# Altium PCB PCB1.PcbDoc
Units mm, origin at the board's own origin, x right, y up, seen from the top; angles counter-clockwise.
Board outline 36.2 x 44.83 mm, 4 copper layers (Top Layer 1, Top Layer, Bottom Layer, Bottom Layer 1), stack 0.55 mm thick; 54 components, 49 nets, 224 pads, 41 vias.
Unrouted connection lines stored in the file: 11.
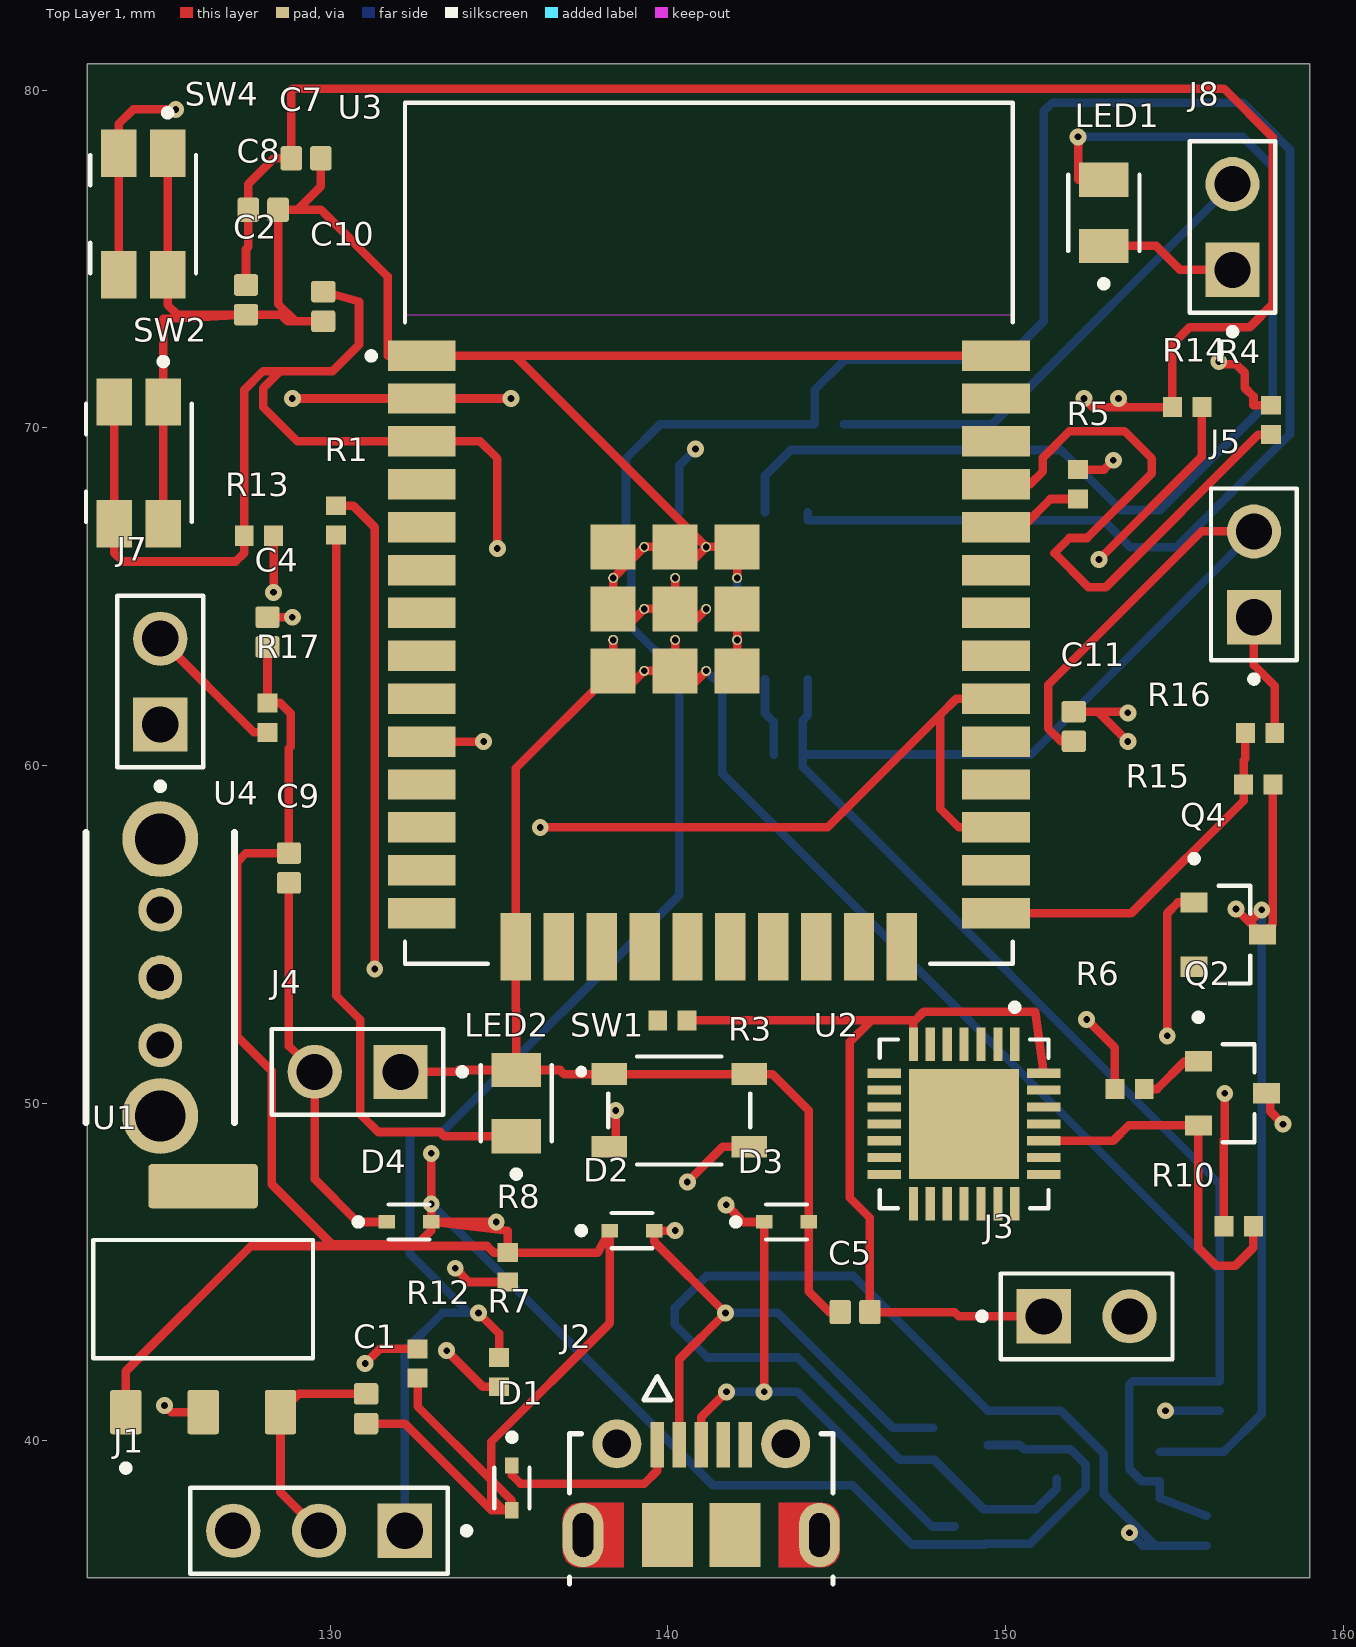
[diagram p0: Top Layer 1 view]
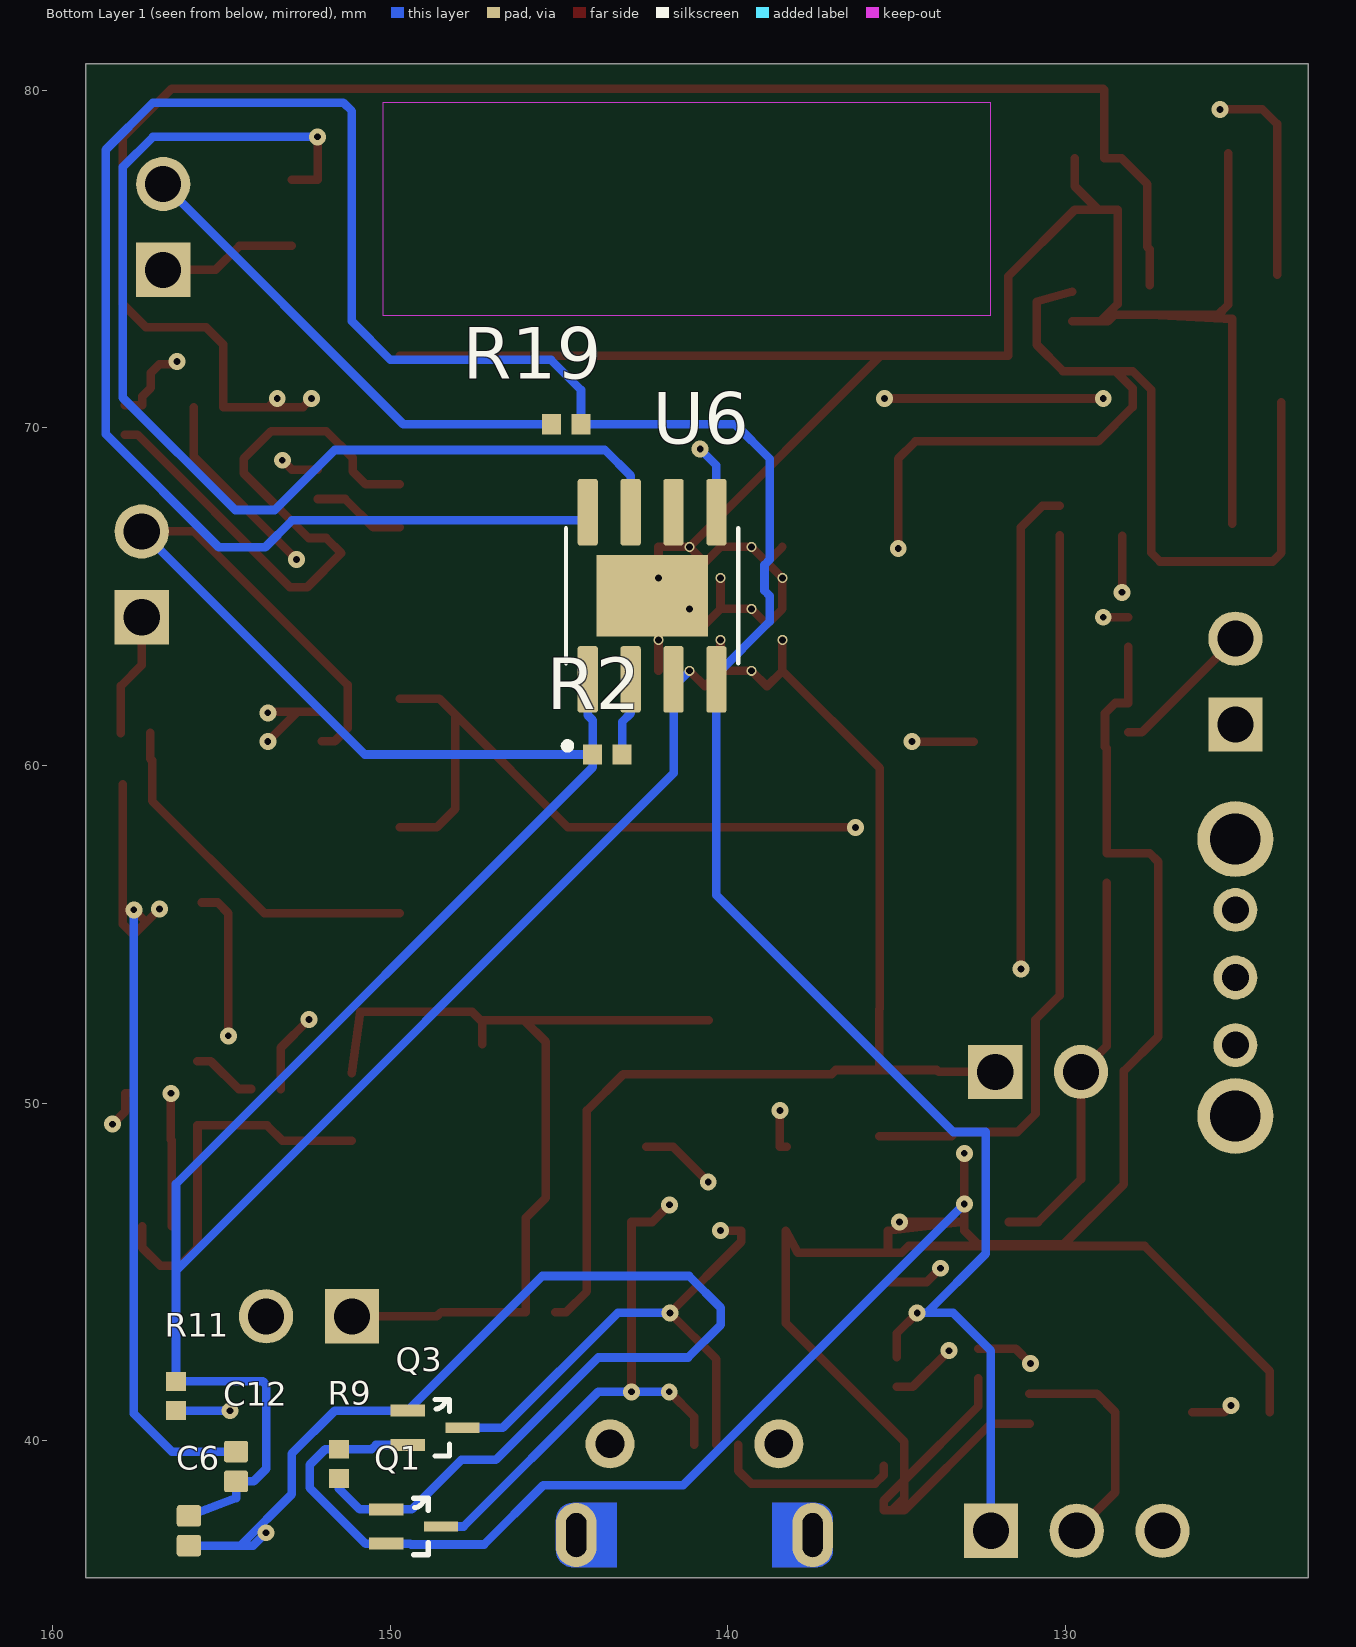
[diagram p1: Bottom Layer 1 view, seen from below]
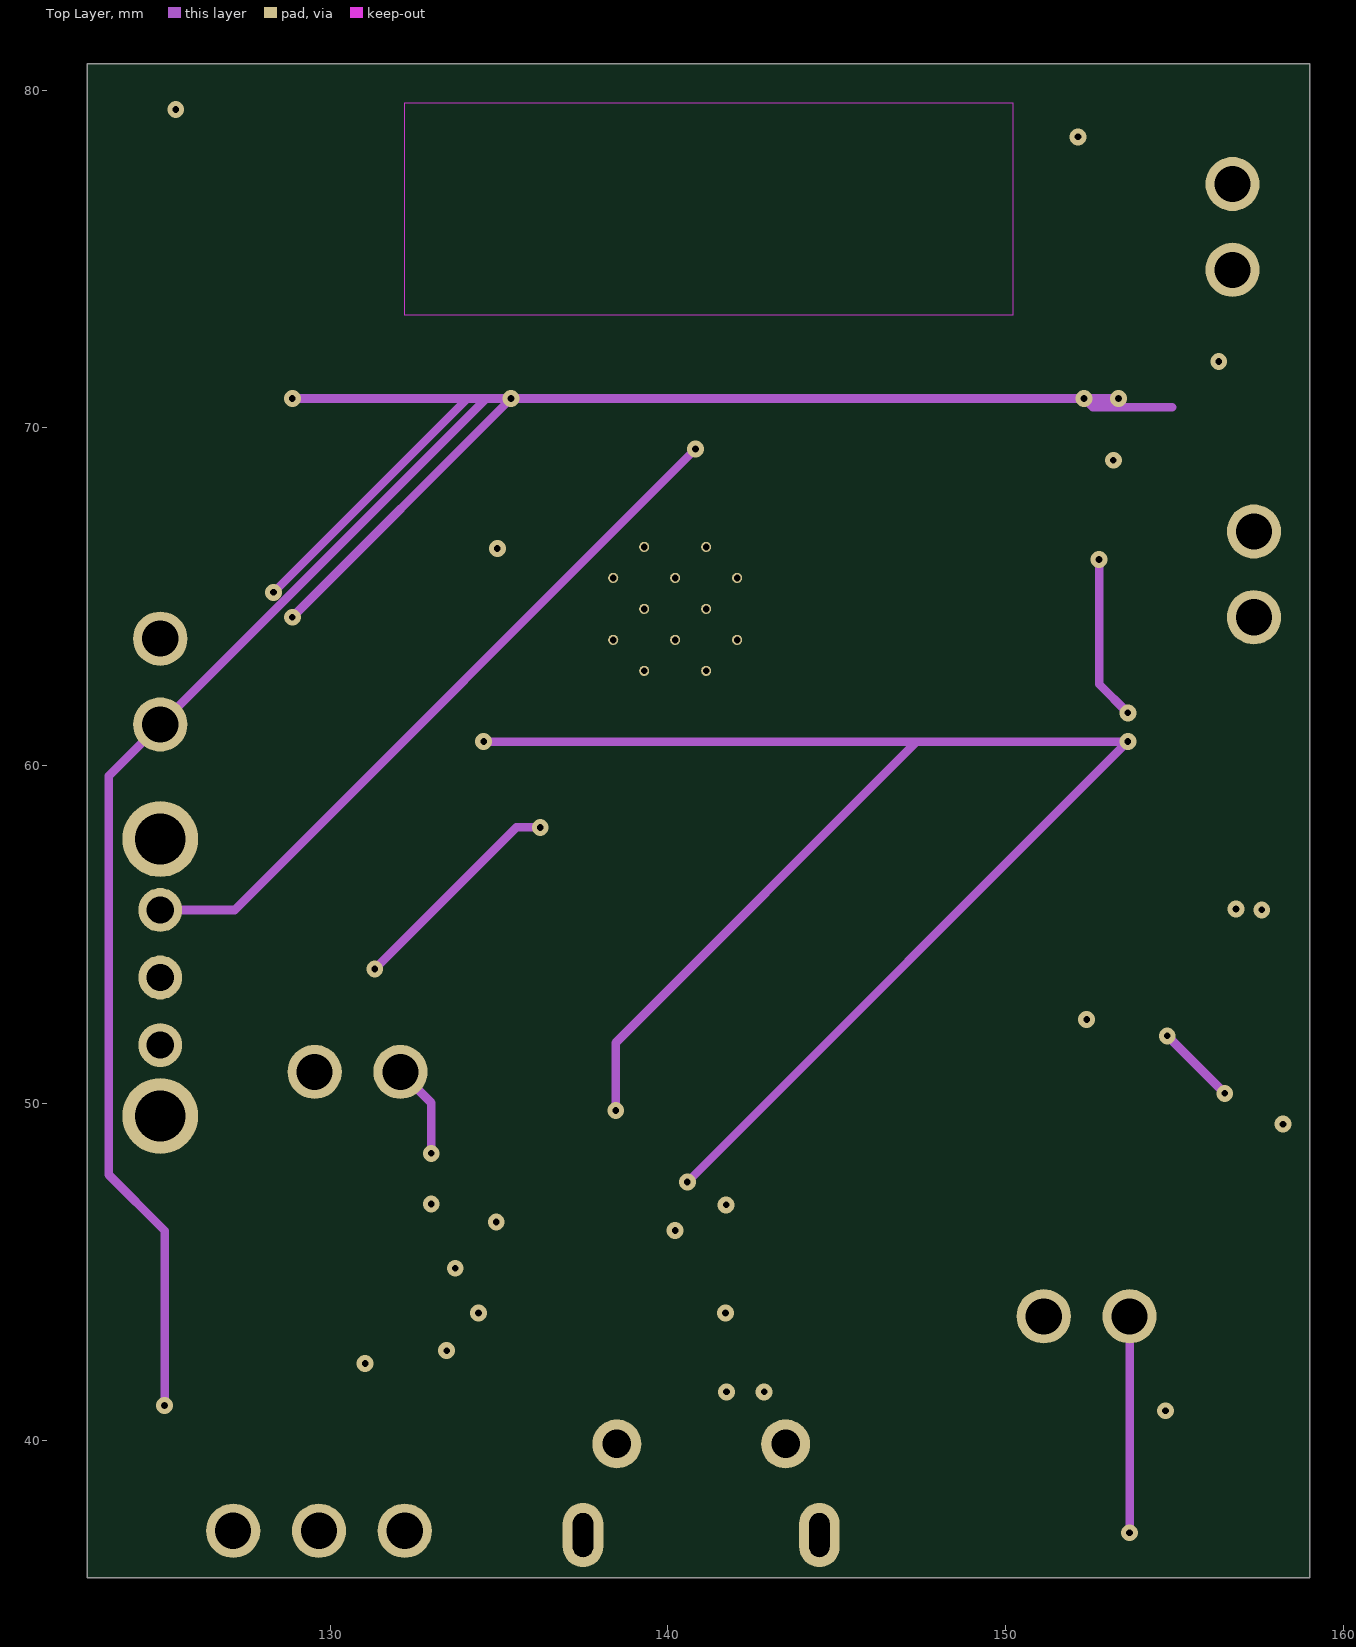
[diagram p2: Top Layer]
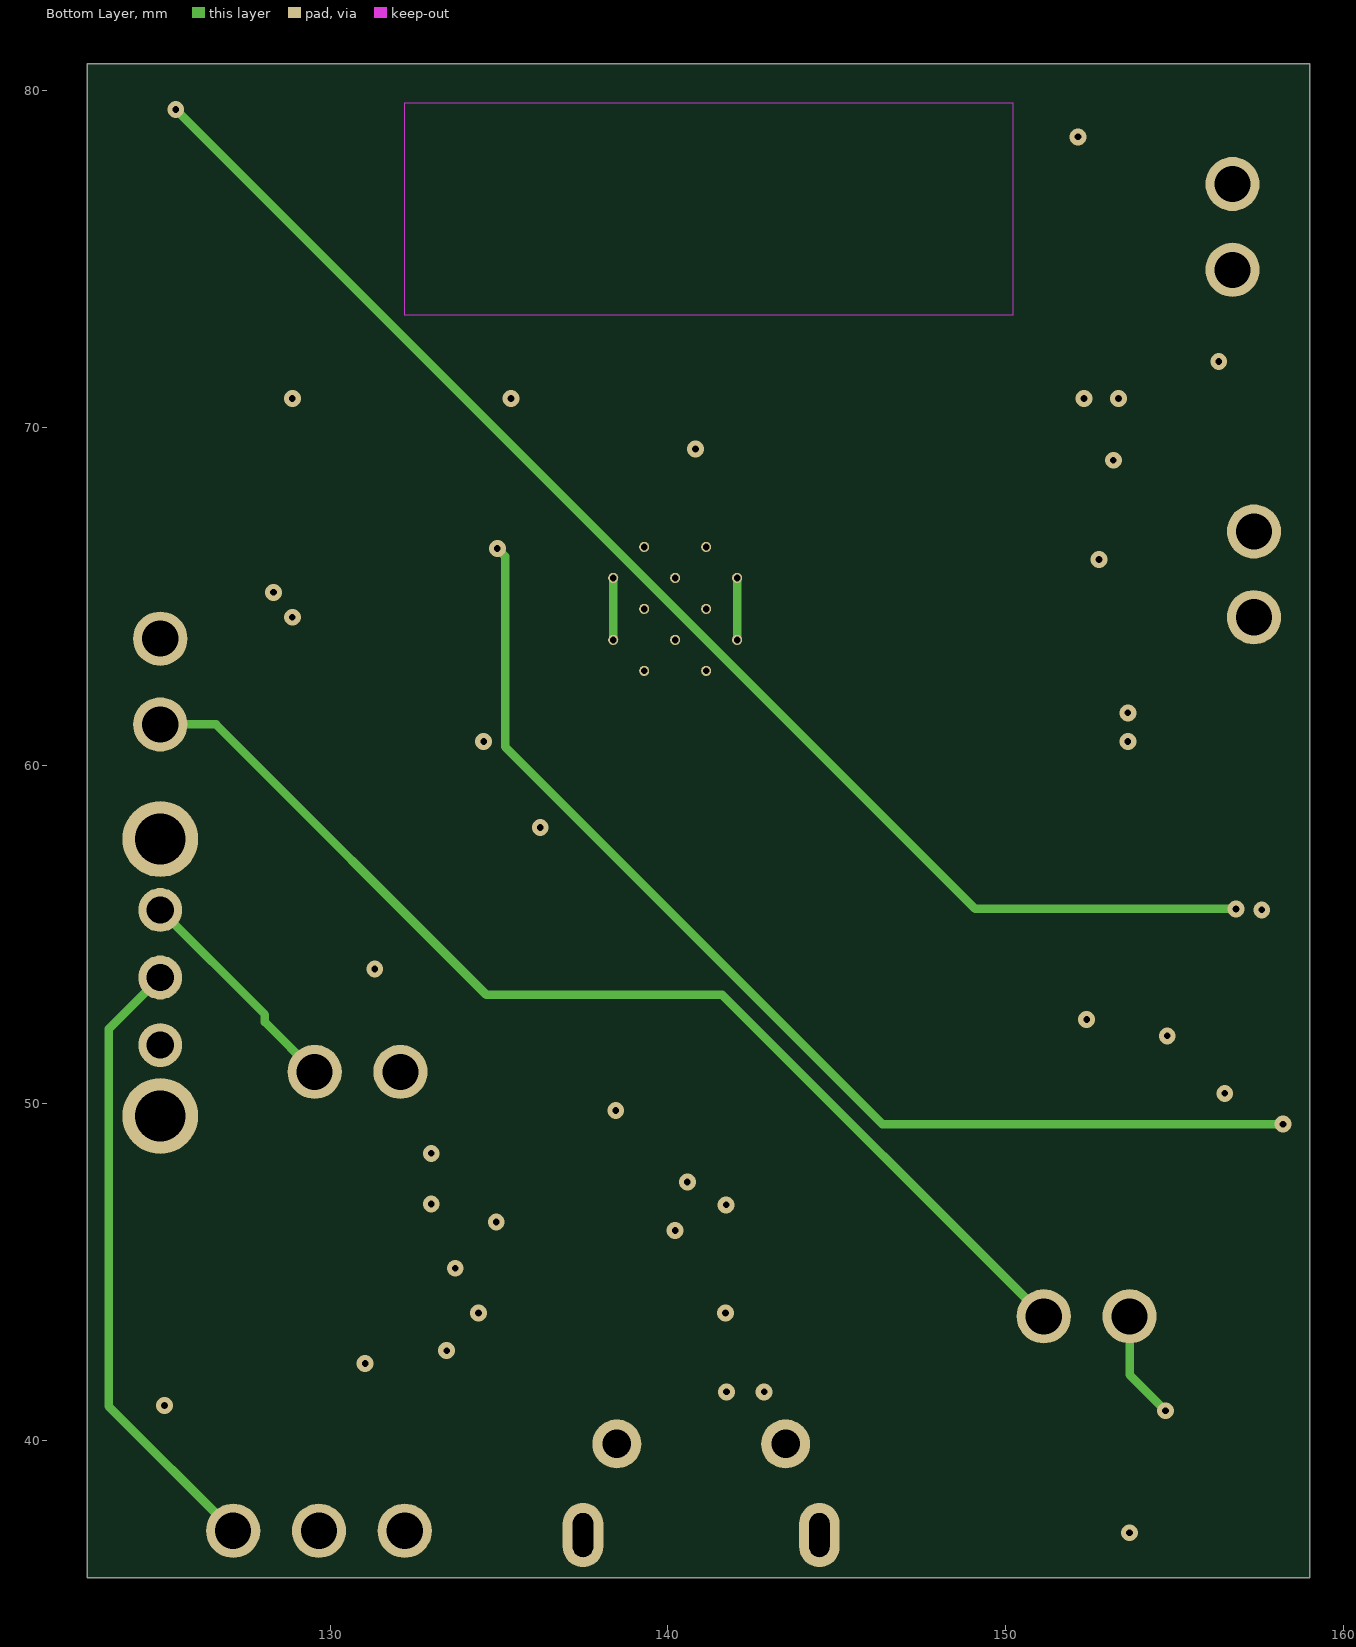
[diagram p3: Bottom Layer]
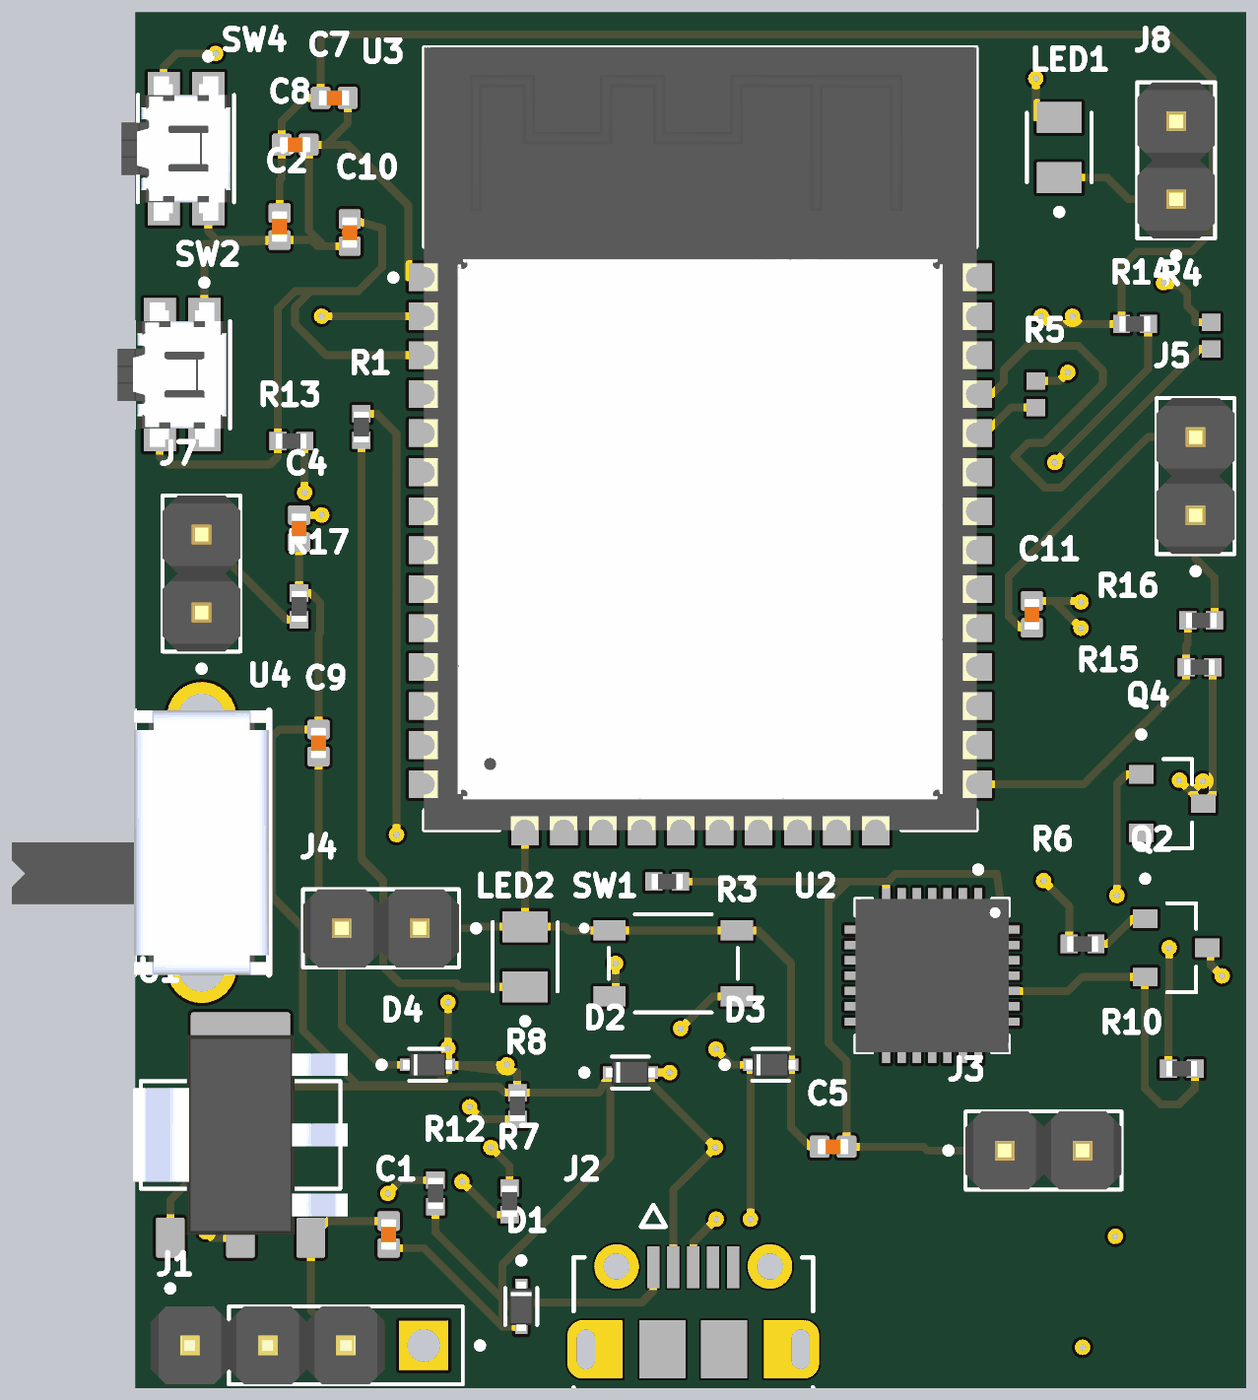
[diagram p4: 3D render of the assembled board from above, using the file's embedded part models]
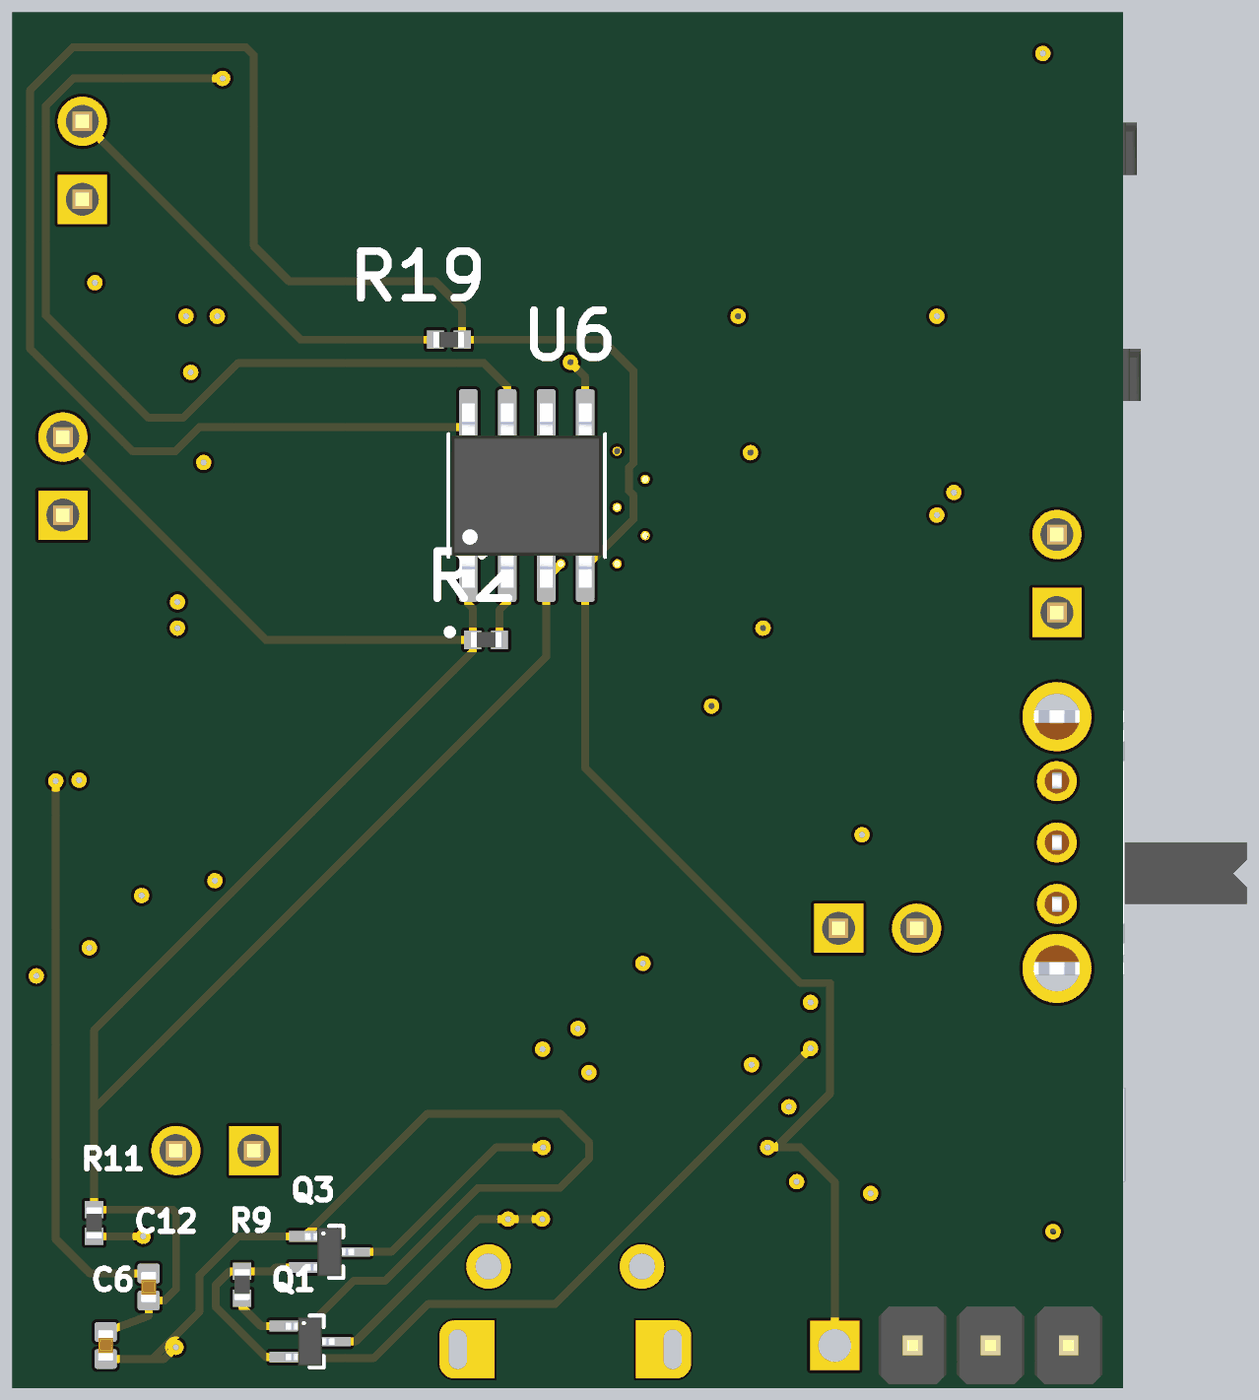
[diagram p5: 3D render of the assembled board from below, using the file's embedded part models]

## Layer stack, top to bottom
Top Solder: solder mask 0.0102, Solder Resist, Dk 3.5
Top Layer 1: signal copper 0.035
Dielectric 2: prepreg 0.0711, PP-006, Dk 4.1
Top Layer: signal copper 0.009
Dielectric 1: dielectric 0.32, FR-4, Dk 4.8
Bottom Layer: signal copper 0.009
Dielectric 3: prepreg 0.0711, PP-006, Dk 4.1
Bottom Layer 1: signal copper 0.035
Bottom Solder: solder mask 0.0102, Solder Resist, Dk 3.5

## Board outline
122.809,35.941 122.809,80.772 159.004,80.772 159.004,35.941

## Design rules (kind name [scope] priority, off if disabled: settings)
Clearance [All] p1: gap=0.254 ignorepadtopadclearanceinfootprint=FALSE
PolygonConnect [All] p1: connectstyle=Relief reliefconductorwidth=0.254 reliefentries=4 polygonreliefangle="90 Angle" airgapwidth=0.254
RoutingVias [All] p1: holewidth=0.2 width=0.5 viastyle="Through Hole" minholewidth=0.2 minwidth=0.5 maxholewidth=0.2 maxwidth=0.5
SolderMaskExpansion [All] p1: expansion=0.102 istentingtop=FALSE
SupplyNets "Schematic Supply Nets" [InNet('GND')] p1: voltage=0.000
Width [All] p1: maxlimit=0.254 minlimit=0.254 preferedwidth=0.254
30 further rules are at their usual default settings.

## Components (designator, comment, footprint, x,y, rotation, side; value= is the part's Value field where it differs from the comment)
C1 "10uF" CAPC1005X70N 131.064,40.953 r90 top
C2 "10uF" CAPC1005X70N 127.508,73.787 r90 top
C4 "4.7uF" CAPC1005X70N 128.143,63.949 r90 top
C5 "100nF" CAPC1005X70N 145.542,43.815 r0 top
C6 "100nF" CAPC1005X70N 155.956,37.338 r90 bottom
C7 "22nF" CAPC1005X70N 129.286,77.978 r0 top
C8 "100nF" CAPC1005X70N 128.016,76.454 r0 top
C9 "100nF" CAPC1005X70N 128.778,56.964 r90 top
C10 "100nF" CAPC1005X70N 129.794,73.592 r90 top
C11 "100nF" CAPC1005X70N 152.019,61.155 r90 top
C12 "100nF" CAPC1005X70N 154.559,39.243 r90 bottom
D1 "LESD5D5.0CT1G" TVS_LESD5D5.0CT1G 135.382,38.608 r270 top
D2 "LESD5D5.0CT1G" TVS_LESD5D5.0CT1G 138.938,46.228 r0 top
D3 "LESD5D5.0CT1G" TVS_LESD5D5.0CT1G 143.51,46.482 r0 top
D4 "LESD5D5.0CT1G" TVS_LESD5D5.0CT1G 132.334,46.482 r0 top
J1 "M20-9990345" HARWIN_M20-9990345 129.667,37.338 r180 top
J2 "1050170001" MOLEX_1050170001 140.986,35.761 r0 top
J3 "M20-9990245" HARWIN_M20-9990245 152.4,43.688 r0 top
J4 "M20-9990245" HARWIN_M20-9990245 130.81,50.927 r180 top
J5 "M20-9990245" HARWIN_M20-9990245 157.353,65.659 r90 top
J7 "M20-9990245" HARWIN_M20-9990245 124.968,62.484 r90 top
J8 "M20-9990245" HARWIN_M20-9990245 156.718,75.946 r90 top
LED1 "SM0805UGC" LEDC2012X135N 152.908,76.363 r90 top
LED2 "SM0805UGC" LEDC2012X135N 135.509,50.002 r90 top
Q1 "2N7002T-7-F" SOT50P160X90-3N 149.301,37.465 r180 bottom
Q2 "SS8050-G" TRANS_SS8050-G 156.718,50.292 r0 top
Q3 "2N7002T-7-F" SOT50P160X90-3N 148.666,40.386 r180 bottom
Q4 "SS8050-G" TRANS_SS8050-G 156.591,54.991 r0 top
R1 "330" RESC1005X40N 130.175,67.256 r90 top
R2 "2K" RESC1005X40N 143.564,60.325 r180 bottom
R3 "1K" RESC1005X40N 140.135,52.451 r0 top
R4 "0" RESC1005X40N 157.861,70.231 r90 top
R5 "0" RESC1005X40N 152.146,68.326 r90 top
R6 "10K" RESC1005X40N 153.67,50.419 r0 top
R7 "22.1K" RESC1005X40N 135.001,42.037 r90 top
R8 "10K" RESC1005X40N 135.255,45.139 r90 top
R9 "1K" RESC1005X40N 151.511,39.316 r90 bottom
R10 "10K" RESC1005X40N 156.899,46.355 r180 top
R11 "10K" RESC1005X40N 156.337,41.329 r90 bottom
R12 "47.5K" RESC1005X40N 132.588,42.291 r90 top
R13 "10K" RESC1005X40N 127.889,66.802 r0 top
R14 "10K" RESC1005X40N 155.375,70.612 r180 top
R15 "22" RESC1005X40N 157.48,59.436 r180 top
R16 "22" RESC1005X40N 157.534,60.96 r180 top
R17 "330" RESC1005X40N 128.143,61.414 r90 top
R19 "1K" RESC1005X40N 144.78,70.104 r0 bottom
SW1 "SKRPACE010" SW_SKRPACE010 140.335,49.784 r0 top
SW2 "EVQ-P7A01P" SW_EVQ-P7A01P 124.333,68.961 r270 top
SW4 "EVQ-P7A01P" SW_EVQ-P7A01P 124.46,76.327 r270 top
U1 "AMS1117-3.3" SOT229P700X180-4N 126.238,44.196 r90 top
U2 "CP2102N-A02-GQFN28" QFN50P500X500X80-29N 148.77,49.387 r270 top
U3 "ESP32-WROOM-32D" MODULE_ESP32-WROOM-32D 141.215,66.876 r0 top
U4 "OS102011MA1QN1" OS102011MA1QN1 124.968,53.721 r270 top
U6 "TP4056" SOP127P600X175-9N 142.24,65.024 r90 bottom

## Footprints (in the part's own frame and the unit in brackets; to place one, negate y for a bottom-side part, rotate by r counter-clockwise, add the part's x,y. Pads: shape width x height; smd on the part's side, far side on the other; paste and mask are expansions set on the pad)
CAPC1005X70N [mm]
  rrect25% 0.64x0.72 smd: 1(-0.44,0) 2(0.44,0)
  body extent -0.5,-0.25 0.5,0.25, height 0.55
HARWIN_M20-9990245 [mm]
  rect 1.605x1.605 / inner round 1.605 / far side rect 1.605x1.605 hole 1.07: 1(-1.27,0)
  round 1.605 hole 1.07: 2(1.27,0)
  silkscreen extent -3.2,-1.27 2.54,1.27, body extent -2.54,-1.27 2.54,1.27, height 8.74
HARWIN_M20-9990345 [mm]
  rect 1.605x1.605 / inner round 1.605 / far side rect 1.605x1.605 hole 1.07: 1(-2.54,0)
  round 1.605 hole 1.07: 2(0,0) 3(2.54,0)
  silkscreen extent -4.47,-1.27 3.81,1.27, body extent -1.27,-1.27 6.35,1.27, height 7.37
LEDC2012X135N [mm]
  rect 1.01x1.47 smd: A(-0.98,0) C(0.98,0)
  silkscreen extent -2.2,-1.06 1.13,1.06
MODULE_ESP32-WROOM-32D [mm]
  rect 2x0.9 smd: 1(-8.5,5.26) 2(-8.5,3.99) 3(-8.5,2.72) 4(-8.5,1.45) 5(-8.5,0.18) 6(-8.5,-1.09) 7(-8.5,-2.36) 8(-8.5,-3.63) 9(-8.5,-4.9) 10(-8.5,-6.17) 11(-8.5,-7.44) 12(-8.5,-8.71) 13(-8.5,-9.98) 14(-8.5,-11.25) 25(8.5,-11.25) 26(8.5,-9.98) 27(8.5,-8.71) 28(8.5,-7.44) 29(8.5,-6.17) 30(8.5,-4.9) 31(8.5,-3.63) 32(8.5,-2.36) 33(8.5,-1.09) 34(8.5,0.18) 35(8.5,1.45) 36(8.5,2.72) 37(8.5,3.99) 38(8.5,5.26)
  rect 0.9x2 smd: 15(-5.715,-12.25) 16(-4.445,-12.25) 17(-3.175,-12.25) 18(-1.905,-12.25) 19(-0.635,-12.25) 20(0.635,-12.25) 21(1.905,-12.25) 22(3.175,-12.25) 23(4.445,-12.25) 24(5.715,-12.25)
  rect 1.33x1.33 smd: 39_1(-2.835,-0.405) 39_2(-1,-0.405) 39_3(0.835,-0.405) 39_4(-2.835,-2.24) 39_5(-1,-2.24) 39_6(0.835,-2.24) 39_7(-2.835,-4.075) 39_8(-1,-4.075) 39_9(0.835,-4.075)
  round 0.3 hole 0.2: 39_10(-1.917,-0.405) 39_11(-0.082,-0.405) 39_12(-2.835,-1.323) 39_13(-1,-1.323) 39_14(0.835,-1.323) 39_15(-1.917,-2.24) 39_16(-0.082,-2.24) 39_17(-2.835,-3.158) 39_18(-1,-3.158) 39_19(0.835,-3.158) 39_20(-1.917,-4.075) 39_21(-0.082,-4.075)
  Keep-Out Layer region: 9,6.45 -9,6.45 -9,12.75 9,12.75
  silkscreen extent -10.1,-12.75 9,12.75, body extent -9,-12.75 9,12.75, height 3.25
MOLEX_1050170001 [mm]
  rect 0.4x1.35 smd mask+0.064: 1(-1.3,4.125) 2(-0.65,4.125) 3(0,4.125) 4(0.65,4.125) 5(1.3,4.125)
  round 1.45 hole 0.85 mask+0.064: SH1(-2.5,4.15) SH2(2.5,4.15)
  oval 1.2x1.9 hole 0.6 slot 1.3 at 90 deg mask+0: SH3(-3.5,1.45) SH6(3.5,1.45)
  rect 1.5x1.9 smd mask+0.064: SH4(-1,1.45) SH5(1,1.45)
  Top Layer 1 region: -2.3,0.5 -3.6,0.5 -3.626,0.501 -3.652,0.503 -3.678,0.506 -3.704,0.511 -3.729,0.517 -3.755,0.524 -3.779,0.533 -3.803,0.543 -3.827,0.554 -3.85,0.567 -3.872,0.581 -3.894,0.595 -3.915,0.611 -3.935,0.628 -3.954,0.646 -3.972,0.665 -3.989,0.685 -4.005,0.706 -4.019,0.728 -4.033,0.75 -4.046,0.773 -4.057,0.797 -4.067,0.821 -4.076,0.845 -4.083,0.871 -4.089,0.896 -4.094,0.922 -4.097,0.948 -4.099,0.974 -4.1,1 -4.1,1.9 -4.099,1.926 -4.097,1.952 -4.094,1.978 -4.089,2.004 -4.083,2.029 -4.076,2.055 -4.067,2.079 -4.057,2.103 -4.046,2.127 -4.033,2.15 -4.019,2.172 -4.005,2.194 -3.989,2.215 -3.972,2.235 -3.954,2.254 -3.935,2.272 -3.915,2.289 -3.894,2.305 -3.872,2.319 -3.85,2.333 -3.827,2.346 -3.803,2.357 -3.779,2.367 -3.755,2.376 -3.729,2.383 -3.704,2.389 -3.678,2.394 -3.652,2.397 -3.626,2.399 -3.6,2.4 -2.3,2.4
  Top Layer 1 region: 3.626,2.399 3.652,2.397 3.678,2.394 3.704,2.389 3.729,2.383 3.755,2.376 3.779,2.367 3.803,2.357 3.827,2.346 3.85,2.333 3.872,2.319 3.894,2.305 3.915,2.289 3.935,2.272 3.954,2.254 3.972,2.235 3.989,2.215 4.005,2.194 4.019,2.172 4.033,2.15 4.046,2.127 4.057,2.103 4.067,2.079 4.076,2.055 4.083,2.029 4.089,2.004 4.094,1.978 4.097,1.952 4.099,1.926 4.1,1.9 4.1,1 4.099,0.974 4.097,0.948 4.094,0.922 4.089,0.896 4.083,0.871 4.076,0.845 4.067,0.821 4.057,0.797 4.046,0.773 4.033,0.75 4.019,0.728 4.005,0.706 3.989,0.685 3.972,0.665 3.954,0.646 3.935,0.628 3.915,0.611 3.894,0.595 3.872,0.581 3.85,0.567 3.827,0.554 3.803,0.543 3.779,0.533 3.755,0.524 3.729,0.517 3.704,0.511 3.678,0.506 3.652,0.503 3.626,0.501 3.6,0.5 2.3,0.5 2.3,2.4 3.6,2.4
  Bottom Layer 1 region: 3.626,2.399 3.652,2.397 3.678,2.394 3.704,2.389 3.729,2.383 3.755,2.376 3.779,2.367 3.803,2.357 3.827,2.346 3.85,2.333 3.872,2.319 3.894,2.305 3.915,2.289 3.935,2.272 3.954,2.254 3.972,2.235 3.989,2.215 4.005,2.194 4.019,2.172 4.033,2.15 4.046,2.127 4.057,2.103 4.067,2.079 4.076,2.055 4.083,2.029 4.089,2.004 4.094,1.978 4.097,1.952 4.099,1.926 4.1,1.9 4.1,1 4.099,0.974 4.097,0.948 4.094,0.922 4.089,0.896 4.083,0.871 4.076,0.845 4.067,0.821 4.057,0.797 4.046,0.773 4.033,0.75 4.019,0.728 4.005,0.706 3.989,0.685 3.972,0.665 3.954,0.646 3.935,0.628 3.915,0.611 3.894,0.595 3.872,0.581 3.85,0.567 3.827,0.554 3.803,0.543 3.779,0.533 3.755,0.524 3.729,0.517 3.704,0.511 3.678,0.506 3.652,0.503 3.626,0.501 3.6,0.5 2.3,0.5 2.3,2.4 3.6,2.4
  Bottom Layer 1 region: -2.3,0.5 -3.6,0.5 -3.626,0.501 -3.652,0.503 -3.678,0.506 -3.704,0.511 -3.729,0.517 -3.755,0.524 -3.779,0.533 -3.803,0.543 -3.827,0.554 -3.85,0.567 -3.872,0.581 -3.894,0.595 -3.915,0.611 -3.935,0.628 -3.954,0.646 -3.972,0.665 -3.989,0.685 -4.005,0.706 -4.019,0.728 -4.033,0.75 -4.046,0.773 -4.057,0.797 -4.067,0.821 -4.076,0.845 -4.083,0.871 -4.089,0.896 -4.094,0.922 -4.097,0.948 -4.099,0.974 -4.1,1 -4.1,1.9 -4.099,1.926 -4.097,1.952 -4.094,1.978 -4.089,2.004 -4.083,2.029 -4.076,2.055 -4.067,2.079 -4.057,2.103 -4.046,2.127 -4.033,2.15 -4.019,2.172 -4.005,2.194 -3.989,2.215 -3.972,2.235 -3.954,2.254 -3.935,2.272 -3.915,2.289 -3.894,2.305 -3.872,2.319 -3.85,2.333 -3.827,2.346 -3.803,2.357 -3.779,2.367 -3.755,2.376 -3.729,2.383 -3.704,2.389 -3.678,2.394 -3.652,2.397 -3.626,2.399 -3.6,2.4 -2.3,2.4
  silkscreen extent -3.9,0 3.9,6.15
OS102011MA1QN1 [mm]
  round 1.3 hole 0.8: 1(-2,0) 2(0,0) 3(2,0)
  round 2.25 hole 1.5: 4(-4.1,0) 5(4.1,0)
  silkscreen extent -4.3,-2.2 4.3,2.2, body extent -4.31,-6.18 4.31,2.2, height 4.7
QFN50P500X500X80-29N [mm]
  rect 0.99x0.27 smd: 1(-2.36,1.5) 2(-2.36,1) 3(-2.36,0.5) 4(-2.36,0) 5(-2.36,-0.5) 6(-2.36,-1) 7(-2.36,-1.5) 15(2.36,-1.5) 16(2.36,-1) 17(2.36,-0.5) 18(2.36,0) 19(2.36,0.5) 20(2.36,1) 21(2.36,1.5)
  rect 0.27x0.99 smd: 8(-1.5,-2.36) 9(-1,-2.36) 10(-0.5,-2.36) 11(0,-2.36) 12(0.5,-2.36) 13(1,-2.36) 14(1.5,-2.36) 22(1.5,2.36) 23(1,2.36) 24(0.5,2.36) 25(0,2.36) 26(-0.5,2.36) 27(-1,2.36) 28(-1.5,2.36)
  rect 3.25x3.25 smd paste-0.597: 29(0,0)
  silkscreen extent -3.55,-2.5 2.5,2.5, body extent -2.5,-2.5 2.5,2.5, height 0.38
RESC1005X40N [mm]
  rect 0.56x0.6 smd: 1(-0.435,0) 2(0.435,0)
  body extent -0.5,-0.25 0.5,0.25, height 0.35
SOP127P600X175-9N [mm]
  rrect25% 1.97x0.6 smd: 1(-2.475,1.905) 2(-2.475,0.635) 3(-2.475,-0.635) 4(-2.475,-1.905) 5(2.475,-1.905) 6(2.475,-0.635) 7(2.475,0.635) 8(2.475,1.905)
  rect 2.413x3.302 smd paste-3: 9(0,0)
  silkscreen extent -4.54,-2.55 2,2.6, body extent -3,-2.45 3,2.45, height 1.75
SOT50P160X90-3N [mil]
  rect 40x14 smd: 1(-32,20) 2(-32,-20)
  rect 40x12 smd: 3(32,0)
  silkscreen extent 0,-33 17,33, body extent -31,-31 31,31, height 31
SOT229P700X180-4N [mm]
  rrect15% 1.31x0.93 smd: 1(-3.345,2.29) 2(-3.345,0) 3(-3.345,-2.29)
  rrect15% 1.31x3.24 smd: 4(3.345,0)
  silkscreen extent -5.1,-3.25 1.75,3.25, body extent -3.25,-3.5 3.25,3.5, height 1.8
SW_EVQ-P7A01P [mm]
  rect 1.4x1.05 smd: 1_1(-1.8,0.725) 1_2(1.8,0.725) 2_1(-1.8,-0.725) 2_2(1.8,-0.725)
  silkscreen extent -3.1,-1.56 1.75,1.56, body extent -2.35,-2.1 2.35,1.45, height 1.35
SW_SKRPACE010 [mm]
  rect 1.05x0.65 smd: 1(-2.075,1.075) 2(2.075,1.075) 3(-2.075,-1.075) 4(2.075,-1.075)
  silkscreen extent -3.01,-1.6 2.1,1.6
TRANS_SS8050-G [mm]
  rect 0.8x0.6 smd: 1(-1.01,0.95) 2(-1.01,-0.95) 3(1.01,0)
  silkscreen extent -1.11,-1.45 0.65,2.35
TVS_LESD5D5.0CT1G [mm]
  rect 0.48x0.4 smd: 1(-0.66,0) 2(0.66,0)
  silkscreen extent -1.6,-0.52 0.6,0.52, body extent -0.8,-0.4 0.8,0.4, height 0.7

## Part data
C1 C2 C4 C6 C7 C8 C9 C10 C11 C12: library part CL05A475KP5NRNC, "4.7 ÂµF Â±10% 10V Ceramic Capacitor X5R 0402 (1005 Metric)", Package="SMD-2-2 Samsung", Check_prices=https://www.snapeda.com/parts/CL05A475KP5NRNC/Samsung/view-part/?ref=eda, MF="Samsung Electro-Mechanics", MP=CL05A475KP5NRNC, SnapEDA_Link=https://www.snapeda.com/parts/CL05A475KP5NRNC/Samsung/view-part/?ref=snap
C5: library part CL05B104KO5NNNC, "0.1 ÂµF Â±10% 16V Ceramic Capacitor X7R 0402 (1005 Metric)", Package="SMD-2-2 Samsung", Check_prices=https://www.snapeda.com/parts/CL05B104KO5NNNC/Samsung/view-part/?ref=eda, MF=Samsung, MP=CL05B104KO5NNNC, SnapEDA_Link=https://www.snapeda.com/parts/CL05B104KO5NNNC/Samsung/view-part/?ref=snap
D1 D2 D3 D4: "Transient Voltage Suppressors for ESD Protection", Package=None, Availability="Not in stock", Check_prices=https://www.snapeda.com/parts/LESD5D5.0CT1G/Leshan+Radio+Co./view-part/?ref=eda, MF="Leshan Radio Co.", MP=LESD5D5.0CT1G, Price=None, SnapEDA_Link=https://www.snapeda.com/parts/LESD5D5.0CT1G/Leshan+Radio+Co./view-part/?ref=snap
J1: "2.54mm (0.1) Pitch SIL Vertical Throughboard Pin Header, 6.1mm mating pin height, gold (hi-temp mould), 3 contacts", Package=None, Check_prices=https://www.snapeda.com/parts/M20-9990345/Harwin+Inc./view-part/?ref=eda, MF=Harwin, MP=M20-9990345, SnapEDA_Link=https://www.snapeda.com/parts/M20-9990345/Harwin+Inc./view-part/?ref=snap
J2: "USB - micro B USB 2.0 Receptacle Connector 5 Position Surface Mount, Right Angle; Through Hole", Package=None, Check_prices=https://www.snapeda.com/parts/1050170001/Molex/view-part/?ref=eda, MF=Molex, MP=1050170001, SnapEDA_Link=https://www.snapeda.com/parts/1050170001/Molex/view-part/?ref=snap
J3 J4 J5 J7 J8: Package=None, Availability=Unavailable, MF=Harwin, MP=M20-9990245, Price=None
LED1 LED2: "Green 565nm LED Indication - Discrete 2V 0805 _2012 Metric_", Package="0805 Bivar", Availability=Unavailable, MF="Bivar Inc.", MP=SM0805UGC, Price=None, SnapEDA_Link=https://www.snapeda.com/parts/SM0805UGC/Bivar%20Inc./view-part/841191/?ref=snap
Q1 Q3: "MOSFET N-Channel 60V 0.115A SOT523", Package="SOT-523 Diodes Inc.", Check_prices=https://www.snapeda.com/parts/2N7002T-7-F/Diodes+Inc./view-part/?ref=eda, MF="Diodes Inc.", MP=2N7002T-7-F, SnapEDA_Link=https://www.snapeda.com/parts/2N7002T-7-F/Diodes+Inc./view-part/?ref=snap
Q2 Q4: "Bipolar (BJT) Transistor NPN 25 V 1.5 A 100MHz 300 mW Surface Mount SOT-23-3", Package=None, Check_prices=https://www.snapeda.com/parts/SS8050G/Comchip/view-part/?ref=eda, Digi-Key_Part_Number=641-1790-2-ND, MF=Comchip, MP=SS8050G, SnapEDA_Link=https://www.snapeda.com/parts/SS8050G/Comchip/view-part/?ref=snap
R1 R17: library part 0402WGF3300TCE, "330 Ohm 1/16W Thick Film Resistor 0402 Chip - Surface Mount", Package="0402-2 ROYAL", Check_prices=https://www.snapeda.com/parts/0402WGF3300TCE/Uni-Royal/view-part/?ref=eda, MF=Uni-Royal, MP=0402WGF3300TCE, SnapEDA_Link=https://www.snapeda.com/parts/0402WGF3300TCE/Uni-Royal/view-part/?ref=snap
R2 R3 R9 R19: library part 0402WGF2001TCE, "2K Ohm 1/16W Thick Film Resistor 0402 Chip - Surface Mount", Package="0402-2 ROYAL", Check_prices=https://www.snapeda.com/parts/0402WGF2001TCE/Uni-Royal/view-part/?ref=eda, MF=Uni-Royal, MP=0402WGF2001TCE, SnapEDA_Link=https://www.snapeda.com/parts/0402WGF2001TCE/Uni-Royal/view-part/?ref=snap
R4 R5: library part 0402WGF0000TCE, "0 Ohm 1/16W Thick Film Resistor 0402 Chip - Surface Mount", Package=None, Check_prices=https://www.snapeda.com/parts/0402WGF0000TCE/Uni-Royal/view-part/?ref=eda, MF=Uni-Royal, MP=0402WGF0000TCE, SnapEDA_Link=https://www.snapeda.com/parts/0402WGF0000TCE/Uni-Royal/view-part/?ref=snap
R6 R7 R8 R10 R11 R12 R13 R14 R15 R16: library part 0402WGF1001TCE, "1K Ohm 1/16W Thick Film Resistor 0402 Chip - Surface Mount", Package="0402-2 ROYAL", Check_prices=https://www.snapeda.com/parts/0402WGF1001TCE/Uni-Royal/view-part/?ref=eda, MF=Uni-Royal, MP=0402WGF1001TCE, SnapEDA_Link=https://www.snapeda.com/parts/0402WGF1001TCE/Uni-Royal/view-part/?ref=snap
SW1: "Switch Tactile N.O. SPST Button J-Bend 0.05A 16VDC 2.55N SMD Automotive T/R", Package=None, Availability=Good, Check_prices=https://www.snapeda.com/parts/SKRPACE010/ALPS/view-part/376136/?ref=eda, MF=ALPS, MP=SKRPACE010, Price=None, SnapEDA_Link=https://www.snapeda.com/parts/SKRPACE010/ALPS/view-part/376136/?ref=snap
SW2 SW4: "Switch;Tactile;3.5x2.9mm;Right Angle;Light Touch Switch", Package=None, Check_prices=https://www.snapeda.com/parts/EVQ-P7A01P/Panasonic+Electronic+Components/view-part/?ref=eda, MF="Panasonic Electronic Components", MP=EVQ-P7A01P, SnapEDA_Link=https://www.snapeda.com/parts/EVQ-P7A01P/Panasonic+Electronic+Components/view-part/?ref=snap
U1: "Sot223/Pkg 1-Amp 3.3-Volt Low Drop Out Voltage Regulatator", Package="SOT-223 Seeed Technology", Check_prices=https://www.snapeda.com/parts/AMS1117-3.3/Advanced+Monolithic+Systems/view-part/?ref=eda, MF="Advanced Monolithic Systems", MP=AMS1117-3.3, SnapEDA_Link=https://www.snapeda.com/parts/AMS1117-3.3/Advanced+Monolithic+Systems/view-part/?ref=snap
U2: "USB Bridge, USB to UART USB 2.0 UART Interface 28-QFN (5x5)", Package="WFQFN-28 Silicon Labs", Availability="In Stock", Check_prices=https://www.snapeda.com/parts/CP2102N-A02-GQFN28/Silicon+Labs/view-part/?ref=eda, MF="Silicon Labs", MP=CP2102N-A02-GQFN28, Price=None, Purchase-URL=https://pricing.snapeda.com/search/part/CP2102N-A02-GQFN28/?ref=eda, SnapEDA_Link=https://www.snapeda.com/parts/CP2102N-A02-GQFN28/Silicon+Labs/view-part/?ref=snap
U3: "Bluetooth, WiFi 802.11b/g/n, Bluetooth v4.2 +EDR, Class 1, 2 and 3 Transceiver Module 2.4GHz ~ 2.5GHz Integrated", Package="Non Standard Espressif Systems", Check_prices=https://www.snapeda.com/parts/ESP32-WROOM-32D/Espressif+Systems/view-part/?ref=eda, MF="Espressif Systems", MP=ESP32-WROOM-32D, SnapEDA_Link=https://www.snapeda.com/parts/ESP32-WROOM-32D/Espressif+Systems/view-part/?ref=snap
U4: "Switch,Slide,Mini,SPDT,ON-ON,Non-Shorting(BBM),100mA,12VDC,ThruHole R/A,PC Pin", Package=None, Check_prices=https://www.snapeda.com/parts/OS102011MA1QN1/C%2526K/view-part/?ref=eda, MF=C&K, MP=OS102011MA1QN1, SnapEDA_Link=https://www.snapeda.com/parts/OS102011MA1QN1/C%2526K/view-part/?ref=snap
U6: "Complete single cell Li-Ion battery with a constant current / constant voltage linear charger", Package=Package, Availability="Not in stock", Check_prices=https://www.snapeda.com/parts/TP4056/NanJing+Top+Power+ASIC+Corp./view-part/?ref=eda, MF="NanJing Top Power ASIC Corp.", MP=TP4056, Price=None, SnapEDA_Link=https://www.snapeda.com/parts/TP4056/NanJing+Top+Power+ASIC+Corp./view-part/?ref=snap

## Via types
v1: diameter 0.5, hole 0.2, Top Layer 1 to Bottom Layer 1, 41 vias

## Nets (pads, with @x,y where several pads share a name; then routed paths per layer and width w, separated by ;. In a path a pad name is that pad's centre, name@x,y a point inside that pad or via, vN(x,y) a via of type N, cw(c..) or ccw(c..) an arc to the next point about the centre after c; other vN are vias at no path point)
+3V3: C2.2 C4.2 C5.2 C7.1 C8.1 J3.1 J7.1 R3.2 R13.2 R14.2 U1.2 U2.6 U2.7 U3.2 | length 200.1
  Top Layer 1 w0.254: v1(125.095,41.046) 125.298,40.843 126.238,40.843 U1.2 ; C2.2 127.508,75.286 127.576,75.354 C8.1 127.576,77.216 128.338,77.978 C7.1 128.846,80.002 128.888,80.044 156.464,80.044 157.912,78.596 157.912,73.66 157.226,72.974 155.448,72.974 154.94,72.466 R14.2 153.594,70.612 ; C4.2 v1(128.88,64.389) ; v1(128.324,65.126) R13.2 ; v1(128.88,70.866) U3.2 v1(135.357,70.866) ; R3.2 146.025,52.451 ; U2.7 147.27,52.401 ; J3.1 148.615,43.688 148.488,43.815 C5.2 145.982,46.601 145.39,47.193 145.39,51.816 146.025,52.451 ; 151.13,50.887 150.876,52.705 147.574,52.705 147.27,52.401 ; v1(152.324,70.866) 152.578,70.612 153.34,70.612 153.594,70.612 ; v1(153.34,70.866) 153.594,70.612 ; 146.025,52.451 147.27,52.451 147.27,52.401
  Top Layer w0.254: v1(125.095,41.046) 125.095,46.228 123.444,47.879 123.444,59.69 J7.1 134.62,70.866 ; v1(128.324,65.126) 134.064,70.866 ; v1(128.88,64.389) v1(135.357,70.866) ; v1(128.88,70.866) 134.064,70.866 ; v1(153.34,70.866) v1(152.324,70.866) ; 154.94,70.612 152.578,70.612 v1(152.324,70.866) ; 134.064,70.866 134.62,70.866 ; 134.62,70.866 v1(135.357,70.866) ; v1(135.357,70.866) v1(152.324,70.866)
  Bottom Layer w0.254: J7.1 126.619,61.214 134.62,53.213 141.605,53.213 J3.1
+5V: C1.2 J1.2 U1.3 | length 6.7
  Top Layer 1 w0.254: J1.2 128.528,38.477 U1.3 129.07,41.393 C1.2
+5V_EXT: C9.1 D4.1 J4.2 U4.1 U6.5 | length 42
  Top Layer 1 w0.254: C9.1 128.778,51.689 J4.2 129.54,47.752 130.81,46.482 D4.1
  Top Layer w0.254: U4.1 127.171,55.721 v1(140.818,69.367)
  Bottom Layer w0.254: U4.1 128.067,52.622 128.067,52.4 J4.2
  Bottom Layer 1 w0.254: U6.5 140.335,68.885 v1(140.818,69.367)
+5V_VBUS: J1.1 R7.2 R19.1 U6.4 U6.8 | length 93.7
  Top Layer 1 w0.254: v1(134.391,43.79) 135.001,43.18 R7.2
  Bottom Layer 1 w0.254: J1.1 132.207,42.672 133.325,43.79 134.112,43.79 ; v1(134.391,43.79) 134.112,43.79 ; U6.8 144.145,67.255 152.904,67.255 153.695,66.464 155.069,66.464 158.42,69.814 158.42,78.232 157.023,79.629 151.384,79.629 151.13,79.375 151.13,73.152 149.987,72.009 145.234,72.009 144.345,71.12 R19.1 139.776,70.104 138.76,69.088 138.76,66.091 138.913,65.938 138.913,65.176 138.76,65.024 138.76,64.262 140.335,62.687 U6.4 140.335,56.159 133.321,49.145 132.363,49.145 132.363,45.539 134.112,43.79
DTR: R6.1 U2.28 | length 2.4
  Top Layer 1 w0.254: v1(152.4,52.479) 153.235,51.644 R6.1
EN: C10.2 Q2.3 R13.1 SW2.2_1 SW2.2_2 U3.3 | length 66
  Top Layer 1 w0.254: SW2.2_1 SW2.2_2 123.608,66.294 123.862,66.04 127.2,66.04 127.454,66.294 R13.1 127.454,71.12 128.013,71.679 128.524,71.679 ; C10.2 130.852,73.736 130.852,72.458 130.073,71.679 128.524,71.679 ; v1(134.95,66.421) 134.95,69.088 134.442,69.596 U3.3 129.032,69.596 128.013,70.615 128.013,71.168 128.524,71.679 ; Q2.3 157.836,50.292 157.836,49.759 v1(158.217,49.378)
  Bottom Layer w0.254: v1(134.95,66.421) 135.179,66.192 135.179,60.554 146.355,49.378 v1(158.217,49.378)
GND: C1.1 C2.1 C4.1 C5.1 C6.2 C7.2 C8.2 C9.2 C10.1 C11.1 C12.1 D1.2 D2.1 D3.2 D4.2 J4.1 J5.2 LED2.C Q1.2 Q3.2 R2.1 R8.2 R9.2 R11.2 R12.1 R17.2 SW1.1 SW1.2 SW2.1_1 SW2.1_2 SW4.1_1 SW4.1_2 U1.1 U2.3 U2.29 U3.1 U3.15 U3.38 U3.39_1 U3.39_2 U3.39_3 U3.39_4 U3.39_5 U3.39_6 U3.39_7 U3.39_8 U3.39_9 U3.39_10 U3.39_11 U3.39_12 U3.39_13 U3.39_14 U3.39_15 U3.39_16 U3.39_17 U3.39_18 U3.39_19 U3.39_20 U3.39_21 U6.1 U6.3 U6.9 | length 295
  Top Layer 1 w0.254: U1.1 123.948,42.062 127.656,45.771 134.645,45.771 134.842,45.574 R8.2 ; SW2.1_2 SW2.1_1 125.058,73.22 C2.1 ; SW4.1_1 SW4.1_2 125.185,73.638 125.476,73.347 C2.1 ; C4.1 R17.2 128.524,61.849 128.829,61.544 128.829,60.554 128.778,60.503 C9.2 127.508,57.404 127.254,57.15 127.254,51.968 128.27,50.952 128.27,47.6 130.048,45.822 132.588,45.822 132.994,46.228 D4.2 ; C7.2 129.726,77.148 129.032,76.454 ; C10.1 128.964,73.152 ; C1.1 132.207,40.513 134.772,37.948 135.128,37.948 ; J4.1 133.756,50.927 133.811,50.982 LED2.C ; R12.1 132.588,41.021 134.772,38.837 ; v1(132.994,48.514) v1(132.994,47.015) D4.2 ; v1(134.916,46.482) D4.2 ; U3.39_17 U3.39_7 ; U3.39_1 U3.39_1@138.839,66.012 ; U3.39_18 U3.39_8 ; U3.39_13 U3.39_5 ; U3.39_21 140.674,62.342 U3.39_8 ; U3.39_16 140.674,64.177 U3.39_5 ; U3.39_9 U3.39_19 U3.39_6 ; U3.39_14 U3.39_3 U3.39_11 ; C5.1 144.78,43.815 144.17,44.425 D3.2 144.17,49.784 143.095,50.859 SW1.2 SW1.1 136.927,50.859 136.804,50.982 LED2.C ; U3.38 135.467,72.136 ; C11.1 151.638,60.715 151.257,61.096 151.257,62.382 155.804,66.929 J5.2 ; C2.1 128.549,73.347 128.744,73.152 128.964,73.152 ; 128.964,73.152 128.456,73.66 C8.2 129.032,76.454 ; 129.032,76.454 129.726,76.454 131.699,74.481 131.699,72.136 U3.1 135.467,72.136 ; D4.2 134.892,46.269 135.255,46.228 R8.2 ; 134.772,38.837 135.382,38.227 D1.2 135.128,37.948 ; 134.772,38.837 134.772,39.98 138.278,43.485 D2.1 137.922,45.574 R8.2 ; 134.772,38.837 134.772,38.304 135.128,37.948 ; 135.467,72.136 U3.39_11 ; LED2.C 135.509,52.781 135.5,52.79 U3.15 135.5,59.921 U3.39_7 ; U3.39_7 138.839,62.342 U3.39_20 U3.39_8 ; U3.39_1@138.839,66.012 U3.39_12 U3.39_4 138.839,64.177 U3.39_15 U3.39_5 ; U3.39_1@138.839,66.012 U3.39_10 U3.39_2 140.674,66.012 U3.39_11
  Top Layer w0.254: J4.1 132.994,50.013 v1(132.994,48.514)
  Bottom Layer w0.254: U3.39_17 U3.39_12 ; U3.39_19 U3.39_14
  Bottom Layer 1 w0.254: v1(132.994,47.015) 141.325,38.684 145.466,38.684 147.218,36.932 149.377,36.932 149.403,36.957 Q1.2 150.725,36.957 152.376,38.608 152.376,39.295 151.92,39.751 R9.2 150.546,39.751 150.419,39.878 Q3.2 ; U3.39_21 141.384,62.549 U6.3 141.605,59.766 156.337,45.034 ; U3.39_14 142.05,65.214 U6.9 ; U6.1 144.145,61.487 143.999,61.341 R2.1 ; C6.2 154.559,38.303 C12.1 154.034,38.803 153.664,39.173 153.664,41.656 153.772,41.764 R11.2 156.337,45.034 ; J5.2 150.749,60.325 R2.1 ; R2.1 143.999,59.944 156.337,47.606 156.337,45.034
Io0_BTN: C12.2 Q4.3 R15.1 SW4.2_1 SW4.2_2 | length 72.7
  Top Layer 1 w0.254: SW4.2_2 SW4.2_1 123.735,78.994 124.167,79.426 v1(125.425,79.426) ; v1(156.824,55.753) 157.586,54.991 Q4.3 ; v1(157.586,55.725) 157.226,55.366 Q4.3 ; R15.1 157.915,55.305 Q4.3
  Bottom Layer w0.254: v1(125.425,79.426) 149.098,55.753 v1(156.824,55.753)
  Bottom Layer 1 w0.254: C12.2 156.464,39.683 157.586,40.805 v1(157.586,55.725)
IO0_CON: J5.1 R16.1 | length 3.7
  Top Layer 1 w0.254: J5.1 157.353,62.973 157.969,62.357 R16.1
IO2: U3.24
IO4: U3.26
IO5: U3.29
IO12: U3.14
Io13: U3.16
Io14: U3.13
Io15: U3.23
IO17: U3.28
IO18: R1.2 U3.27 U3.30 | length 40.9
  Top Layer 1 w0.254: R1.2 130.683,67.691 131.318,67.056 v1(131.318,53.975) ; v1(136.22,58.166) 144.729,58.166 148.069,61.506 ; U3.27 148.615,58.166 148.069,58.712 148.069,61.506 ; U3.30 148.539,61.976 148.069,61.506
  Top Layer w0.254: v1(131.318,53.975) 135.509,58.166 v1(136.22,58.166)
IO19: U3.31
IO21: U3.33
IO22: U3.36
IO23: U3.37
IO25: C11.2 R14.1 SW1.3 SW1.4 U3.10 | length 71
  Top Layer 1 w0.254: U3.10 v1(134.544,60.706) ; SW1.3 138.455,48.709 v1(138.455,49.784) ; v1(140.576,47.663) 141.622,48.709 SW1.4 ; C11.2 152.73,61.595 ; v1(152.767,66.102) 155.81,69.145 R14.1 ; v1(153.619,60.706) 152.73,61.595 ; v1(153.619,61.558) 153.582,61.595 152.73,61.595
  Top Layer w0.254: v1(134.544,60.706) 147.371,60.706 ; v1(138.455,49.784) 138.455,51.791 147.371,60.706 ; v1(140.576,47.663) v1(153.619,60.706) 147.371,60.706 ; v1(152.767,66.102) 152.767,62.411 v1(153.619,61.558)
IO26: U3.11
IO27: U3.12
IO32: U3.8
IO33: U3.9
NetC6_1: C6.1 J3.2 Q1.1 Q3.1 R9.1 R11.1 | length 46.9
  Top Layer w0.254: v1(153.67,37.279) J3.2
  Bottom Layer w0.254: J3.2 153.67,41.961 v1(154.737,40.894)
  Bottom Layer 1 w0.254: R9.1 151.511,38.583 150.901,37.973 Q1.1 149.352,37.973 147.884,39.441 146.864,39.441 143.836,42.469 141.173,42.469 140.208,43.434 140.208,43.942 141.148,44.882 145.491,44.882 Q3.1 151.638,40.894 152.908,39.624 152.908,38.422 154.432,36.898 ; v1(153.67,37.279) 154.051,36.898 154.432,36.898 ; v1(154.737,40.894) R11.1 ; C6.1 154.432,36.898
NetD1_1: D1.1 J2.1 | length 5.6
  Top Layer 1 w0.254: D1.1 135.382,38.989 135.636,38.735 139.305,38.735 139.686,39.116 J2.1
NetJ1_3: J1.3 U4.2 | length 18.5
  Bottom Layer w0.254: U4.2 123.444,52.197 123.444,41.021 J1.3
NetJ7_2: J7.2 R17.1 | length 4.3
  Top Layer 1 w0.254: J7.2 127.743,60.979 R17.1
NetJ8_1: J8.1 LED1.A | length 4.1
  Top Layer 1 w0.254: LED1.A 154.457,75.383 155.164,74.676 J8.1
NetJ8_2: J8.2 R19.2 | length 14.4
  Bottom Layer 1 w0.254: R19.2 149.606,70.104 J8.2
NetLED1_C: LED1.C U6.7 | length 33.5
  Top Layer 1 w0.254: v1(152.146,78.613) 152.146,77.343 LED1.C
  Bottom Layer 1 w0.254: U6.7 142.875,68.58 143.637,69.342 151.638,69.342 153.416,67.564 154.585,67.564 157.912,70.891 157.912,77.724 157.023,78.613 v1(152.146,78.613)
NetLED2_A: LED2.A R1.1 | length 22.3
  Top Layer 1 w0.254: R1.1 130.175,53.188 130.886,52.476 130.886,49.682 131.423,49.145 133.252,49.145 133.375,49.022 LED2.A
NetQ2_1: Q2.1 R6.2 | length 1.9
  Top Layer 1 w0.254: R6.2 154.483,50.419 155.306,51.242 Q2.1
NetQ4_1: Q4.1 R10.2 | length 10.9
  Top Layer 1 w0.254: v1(154.788,51.994) 154.788,55.626 155.103,55.941 Q4.1 ; R10.2 156.464,48.895 156.489,48.92 v1(156.489,50.292)
  Top Layer w0.254: v1(154.788,51.994) v1(156.489,50.292)
NetR2_2: R2.2 U6.2 | length 2.3
  Bottom Layer 1 w0.254: U6.2 142.875,61.544 143.129,61.29 R2.2
NetR3_1: R3.1 U2.9
NetR8_1: R8.1 U2.11 | length 1.7
  Top Layer 1 w0.254: v1(133.703,45.11) 134.11,44.704 R8.1
NetR12_2: R12.2 U2.8 | length 1.7
  Top Layer 1 w0.254: v1(131.036,42.291) 131.471,42.726 R12.2
NetR15_2: R15.2 R16.2 U3.25 | length 10.7
  Top Layer 1 w0.254: U3.25 153.721,55.626 157.045,58.95 R15.2 157.045,60.147 157.099,60.201 R16.2
RTS: Q2.2 R10.1 U2.24 | length 11.1
  Top Layer 1 w0.254: U2.24 153.187,48.887 153.642,49.342 Q2.2@155.702,49.342 ; Q2.2 Q2.2@155.702,49.342 ; R10.1 157.334,45.72 156.801,45.187 156.235,45.187 155.702,45.72 Q2.2@155.702,49.342
RXD: R4.2 U2.25 | length 2.5
  Top Layer 1 w0.254: v1(156.309,71.958) 156.385,71.883 156.826,71.883 157.081,71.628 157.081,71.187 157.34,70.927 157.34,70.666 R4.2
RXD0: R5.1 U3.34 | length 2.8
  Top Layer 1 w0.254: U3.34 150.495,67.056 151.33,67.891 R5.1
TXD: R5.2 U2.26 | length 1.2
  Top Layer 1 w0.254: R5.2 152.913,68.761 v1(153.19,69.037)
TXD0: R4.1 U3.35 | length 18.8
  Top Layer 1 w0.254: U3.35 150.724,68.326 151.105,68.707 151.105,69.113 151.892,69.901 153.518,69.901 154.33,69.088 154.33,68.652 152.413,66.735 151.892,66.735 151.445,66.287 152.454,65.278 152.962,65.278 157.48,69.796 R4.1
USB_N: D2.2 J2.2 Q3.3 U2.5 | length 16
  Top Layer 1 w0.254: v1(140.215,46.228) D2.2 139.598,45.898 v1(141.707,43.79) 140.336,42.419 J2.2
  Bottom Layer 1 w0.254: v1(141.707,43.79) 143.256,43.79 146.66,40.386 Q3.3
USB_P: D3.1 J2.3 Q1.3 U2.4 | length 16.6
  Top Layer 1 w0.254: J2.3 140.986,40.707 v1(141.732,41.453) ; v1(141.725,46.99) 142.233,46.482 D3.1 v1(142.85,41.453)
  Bottom Layer 1 w0.254: v1(141.732,41.453) v1(142.85,41.453) 143.836,41.453 147.824,37.465 Q1.3
pads on no net: J2.4 J2.5 J2.SH1 J2.SH2 J2.SH3 J2.SH4 J2.SH5 J2.SH6 Q4.2 R7.1 U1.4 U2.1 U2.2 U2.10 U2.12 U2.13 U2.14 U2.15 U2.16 U2.17 U2.18 U2.19 U2.20 U2.21 U2.22 U2.23 U2.27 U3.4 U3.5 U3.6 U3.7 U3.17 U3.18 U3.19 U3.20 U3.21 U3.22 U3.32 U4.3 U4.4 U4.5 U6.6
copper on no net: | length 2
  Top Layer 1 w0.254: v1(133.449,42.672) 134.519,41.602 135.001,41.602

## Text inside footprints (layer, text, board x,y; h text height)
U3: Mechanical 13 "ANTENNA" at 135.215,75.876 h1.78